# EAGLE board Mega Design (EAGLE 8.4.1)
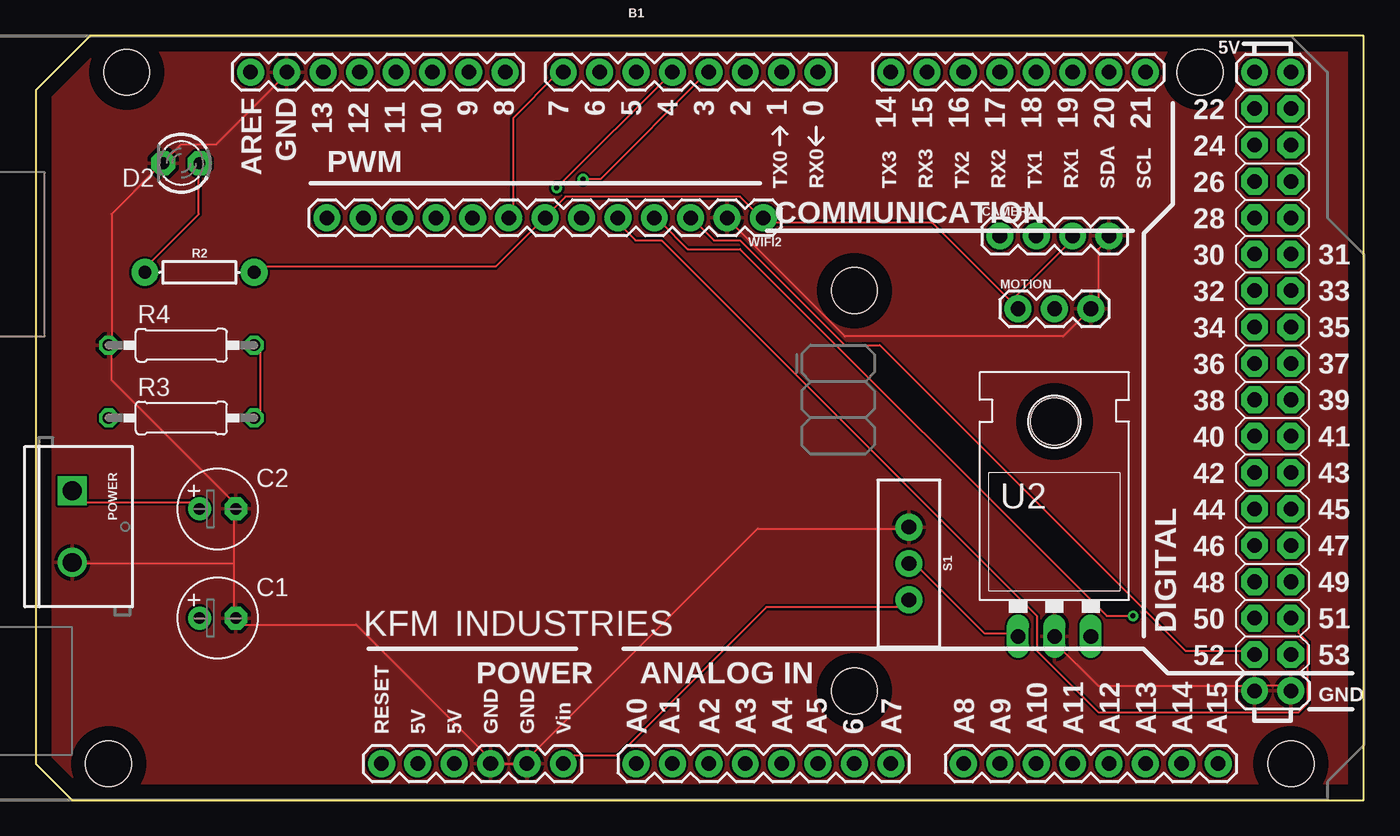
[diagram p0: board, top side]
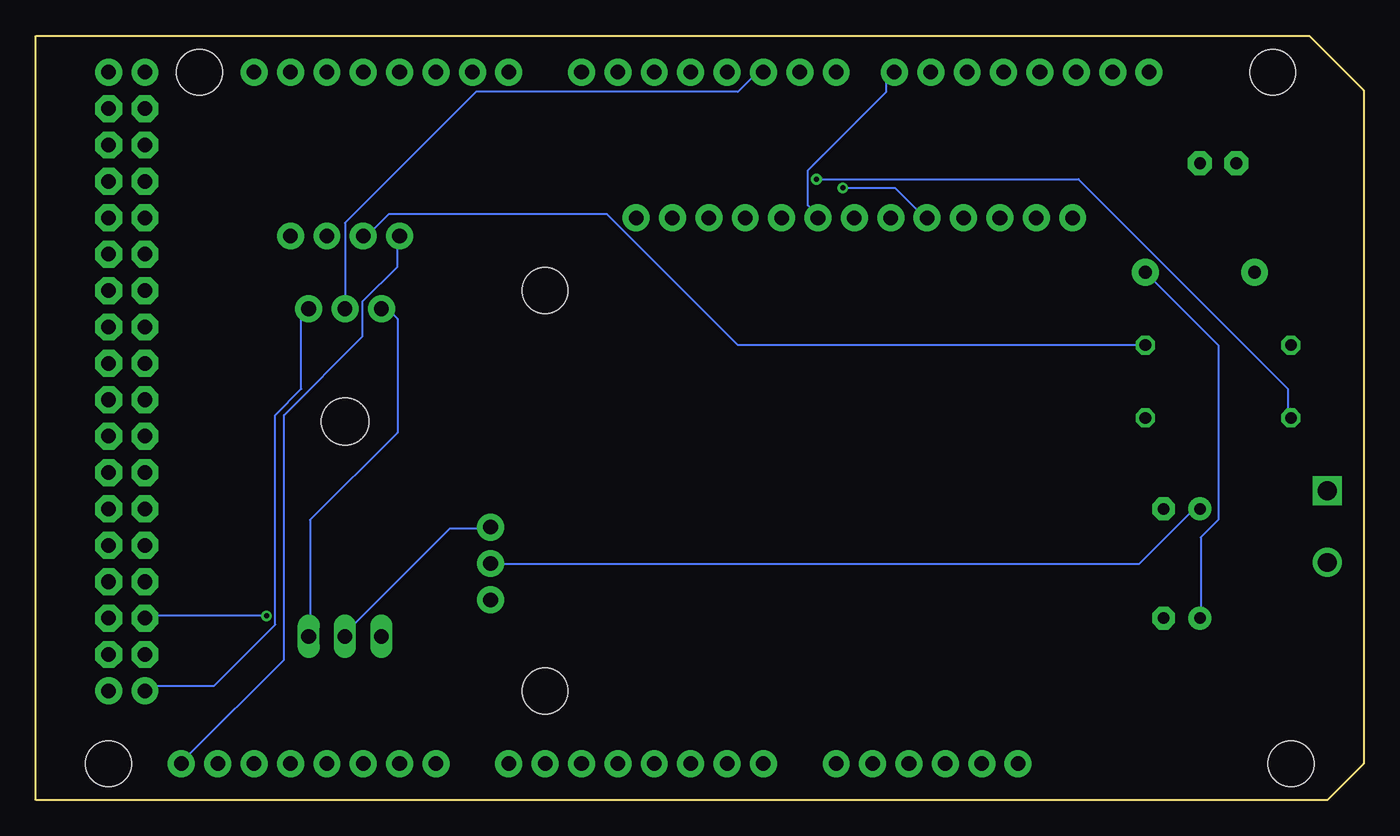
[diagram p1: board, bottom side, seen from below]

Size 92.71 x 53.34 mm. Coordinates in mm from the lower left corner, seen from the top.
Outline: 3.81,53.34 0,49.53 0,2.54 2.54,0 92.71,0 92.71,53.34 3.81,53.34
Copper layers (1*16): Top 0.035mm / dielectric 1.5mm / Bottom 0.035mm
Design rules "default": minimum track width 6mil, minimum drill 0.35mm, track to track 6mil, track to pad 6mil, pad to pad 6mil, via to via 6mil, smd to smd 6mil, copper to edge 40mil, drill to drill 6mil, minimum pad ring 10mil, minimum via ring 8mil, stop-mask expansion 4mil, vias tented up to drill 0mil, thermal gap 10mil
Net classes: 2 gnd: width 0.305 mm, drill 0.711 mm, clearance 0.203 mm

## Footprints (pad centres in the part's own frame; a part is rotated, then mirrored left to right if it is on the bottom)
ARDUINO_MEGA = drill 1.016 pad 1.88: 0 13.97,24.13; 1 11.43,24.13; 2 8.89,24.13; 3 6.35,24.13; 3.3V -13.97,-24.13; 4 3.81,24.13; 5 1.27,24.13; 5V@0 -11.43,-24.13; 5V@1 44.45,24.13; 5V@2 46.99,24.13; 6 -1.27,24.13; 7 -3.81,24.13; 8 -7.874,24.13; 9 -10.414,24.13; 10 -12.954,24.13; 11 -15.494,24.13; 12 -18.034,24.13; 13 -20.574,24.13; 14 19.05,24.13; 15 21.59,24.13; 16 24.13,24.13; 17 26.67,24.13; 18 29.21,24.13; 19 31.75,24.13; 20 34.29,24.13; 21 36.83,24.13; A0 1.27,-24.13; A1 3.81,-24.13; A2 6.35,-24.13; A3 8.89,-24.13; A4 11.43,-24.13; A5 13.97,-24.13; A6 16.51,-24.13; A7 19.05,-24.13; A8 24.13,-24.13; A9 26.67,-24.13; A10 29.21,-24.13; A11 31.75,-24.13; A12 34.29,-24.13; A13 36.83,-24.13; A14 39.37,-24.13; A15 41.91,-24.13; AREF -25.654,24.13; GND@0 -8.89,-24.13; GND@1 -6.35,-24.13; GND@2 44.45,-19.05; GND@3 46.99,-19.05; GND@4 -23.114,24.13; RESET -16.51,-24.13; VIN -3.81,-24.13 | drill 1.016 pad 1.88 octagon: 22 44.45,21.59; 23 46.99,21.59; 24 44.45,19.05; 25 46.99,19.05; 26 44.45,16.51; 27 46.99,16.51; 28 44.45,13.97; 29 46.99,13.97; 30 44.45,11.43; 31 46.99,11.43; 32 44.45,8.89; 33 46.99,8.89; 34 44.45,6.35; 35 46.99,6.35; 36 44.45,3.81; 37 46.99,3.81; 38 44.45,1.27; 39 46.99,1.27; 40 44.45,-1.27; 41 46.99,-1.27; 42 44.45,-3.81; 43 46.99,-3.81; 44 44.45,-6.35; 45 46.99,-6.35; 46 44.45,-8.89; 47 46.99,-8.89; 48 44.45,-11.43; 49 46.99,-11.43; 50 44.45,-13.97; 51 46.99,-13.97; 52 44.45,-16.51; 53 46.99,-16.51 | hole 3.2: -34.29,24.13; -35.56,-24.13; 16.51,8.89; 16.51,-19.05; 40.64,24.13; 46.99,-24.13
E2,5-6 = drill 0.813 pad 1.6: + -1.27,0 | drill 0.813 pad 1.6 octagon: - 1.27,0
1X04 = drill 1.016 pad 1.88: 1 0,0; 2 2.54,0; 3 5.08,0; 4 7.62,0
LED3MM = drill 0.813 pad 1.676 octagon: A -1.27,0; K 1.27,0
1X03 = drill 1.016 pad 1.88: 1 0,0; 2 2.54,0; 3 5.08,0
SCREWTERMINAL-5MM-2 = drill 1.3 pad 2.032 square: 1 0,0 | drill 1.3 pad 2.032: 2 5,0
AXIAL-0.3 = drill 0.9 pad 1.88: P$1 -3.81,0; P$2 3.81,0
0207/10 = drill 0.813 octagon: 1 -5.08,0; 2 5.08,0
SWITCH_SPDT_PTH_11.6X4.0MM = drill 1.016 pad 1.88: 1 0,2.54; 2 0,0; 3 0,-2.54
TO-220-ALT = drill 1.016 long: GND 0,-3.81; IN -2.54,-3.81; OUT 2.54,-3.81 | hole 3.302: 0,11.176
1X13 = drill 1.016 pad 1.88: 1 0,0; 2 2.54,0; 3 5.08,0; 4 7.62,0; 5 10.16,0; 6 12.7,0; 7 15.24,0; 8 17.78,0; 9 20.32,0; 10 22.86,0; 11 25.4,0; 12 27.94,0; 13 30.48,0

## Placement (x,y rotation side)
B1  ARDUINO_MEGA_R3FULL  [ARDUINO_MEGA]  40.64,26.67 0 top
C1  10uf  [E2,5-6]  12.7,12.7 0 top
C2  10uf  [E2,5-6]  12.7,20.32 0 top
CAMERA  [1X04]  67.31,39.37 0 top
D2  [LED3MM]  10.16,44.45 180 top
MOTION  [1X03]  68.58,34.29 0 top
POWER  [SCREWTERMINAL-5MM-2]  2.54,21.59 270 top
R2  1k  [AXIAL-0.3]  11.43,36.83 0 top
R3  10k  [0207/10]  10.16,26.67 0 top
R4  10k  [0207/10]  10.16,31.75 0 top
S1  [SWITCH_SPDT_PTH_11.6X4.0MM]  60.96,16.51 180 top
U2  [TO-220-ALT]  71.12,15.24 0 top
WIFI2  [1X13]  50.8,40.64 180 top

## Library data of the parts
B1 = SparkFun-Boards
C1 C2 R3 R4 = rcl
CAMERA = SparkFun-Connectors; PROD_ID: CONN-09696
D2 = minimidi
MOTION WIFI2 = SparkFun-Connectors
POWER = SparkFun-Connectors; SF_SKU: PRT-08432
R2 = SparkFun-Resistors; PROD_ID: RES-08380
S1 = SparkFun-Switches; PROD_ID: SWCH-08261; SF_SKU: COM-00102
U2 = SparkFun-IC-Power; PROD_ID: VREG-08450; SF_ID: COM-00107

## Nets
9V: B1.VIN S1.1
ANALOG15: B1.A15 CAMERA.1
CLOCK: B1.52 WIFI2.3
DIGITAL2: B1.2
DIGITAL3: B1.3 R3.1
DIGITAL4: B1.4 WIFI2.9
DIGITAL5: B1.5 MOTION.2
DIGITAL6: B1.6
DIGITAL7: B1.7 WIFI2.8
DIGITAL8: B1.8 WIFI2.6
DIGITAL9: B1.9
DIGITAL10: B1.10
DIGITAL11: B1.11
DIGITAL12: B1.12
DIGITAL13: B1.13
GND: B1.GND@0 B1.GND@1 B1.GND@2 B1.GND@3 B1.GND@4 C1.- C2.- CAMERA.4 D2.K MOTION.3 POWER.2 R4.1 S1.3 U2.GND WIFI2.2
MISO: B1.50 WIFI2.4
MOSI: B1.51 WIFI2.5
N$1: C2.+ POWER.1 S1.2 U2.IN
N$3: D2.A R2.P$1
N$4: CAMERA.2 R3.2 R4.2
RX: B1.0
TX: B1.1
VIN: C1.+ CAMERA.3 MOTION.1 R2.P$2 U2.OUT WIFI2.1 WIFI2.7

## Tracks (layer width: path | path; a pad name or v marks a point on that pad's centre or on a via)
9V
  Top 0.152: B1.VIN 36.98,3.1 40.64,3.1 51,13.46 60.76,13.46 S1.1
ANALOG15
  Bottom 0.152: CAMERA.1 67.46,39.06 67.46,37.24 69.9,34.8 69.9,32.36 75.39,26.87 75.39,9.8 82.09,3.1 B1.A15
CLOCK
  Top 0.152: B1.52 84.53,10.41 80.26,10.41 58.93,31.75 56.49,31.75 49.17,39.06 47.35,39.06 46.13,40.28 WIFI2.3
DIGITAL3  (via drill 0.35)
  Top 0.152: v38.2,43.33 39.42,43.33 46.74,50.65 B1.3
  Bottom 0.152: v38.2,43.33 19.91,43.33 5.28,28.7 5.28,26.87 R3.1
DIGITAL4  (via drill 0.35)
  Top 0.152: B1.4 v36.37,42.72
  Bottom 0.152: v36.37,42.72 32.72,42.72 30.89,40.89 WIFI2.9
DIGITAL5
  Bottom 0.152: MOTION.2 71.12,40.28 61.98,49.43 43.69,49.43 42.47,50.65 B1.5
DIGITAL7
  Top 0.152: WIFI2.8 33.33,40.89 33.33,47.6 36.37,50.65 B1.7
DIGITAL8
  Bottom 0.152: B1.8 33.33,50.65 33.33,49.43 38.81,43.94 38.81,41.5 38.2,40.89 WIFI2.6
GND
  Top 0.152: CAMERA.4 74.78,39.06 74.17,38.46 74.17,34.8 MOTION.3 71.73,32.36 56.49,32.36 48.57,40.28 WIFI2.2 | B1.GND@3 87.58,7.98 85.14,7.98 B1.GND@2 84.53,7.98 74.17,7.98 71.12,11.02 U2.GND | 5.28,31.75 5.28,40.89 8.33,43.94 D2.K 8.94,44.55 10.16,45.77 12.6,45.77 17.48,50.65 B1.GND@4 | 13.82,16.51 13.82,20.17 C2.- 13.82,20.78 5.28,29.31 5.28,31.75 | 13.82,16.51 13.82,12.85 C1.- 14.43,12.24 22.35,12.24 31.5,3.1 B1.GND@0 32.11,2.49 33.93,2.49 B1.GND@1 34.54,3.1 50.39,18.95 60.76,18.95 S1.3 | 13.82,16.51 2.84,16.51 POWER.2 | 5.28,31.75 R4.1
  Bottom 0.152: U2.GND 71.12,11.63 63.81,18.95 61.37,18.95 S1.3 | MOTION.3 74.17,34.19 74.17,28.7 76,26.87 76,12.24 80.26,7.98 84.53,7.98 B1.GND@2
  pour Top: 3.81,53.34 0,49.53 0,2.54 2.54,0 92.71,0 92.71,53.34
MISO  (via drill 0.35)
  Top 0.152: v76.61,12.85 74.78,12.85 49.17,38.46 45.52,38.46 43.69,40.28 WIFI2.4
  Bottom 0.152: v76.61,12.85 84.53,12.85 B1.50
MOSI
  Top 0.152: B1.51 88.19,12.24 88.19,11.63 88.8,11.02 88.8,6.76 88.19,6.15 74.17,6.15 69.9,10.41 69.9,12.85 43.69,39.06 41.86,39.06 40.64,40.28 WIFI2.5
N$1
  Top 0.152: C2.+ 11.38,20.78 3.45,20.78 2.84,21.39 POWER.1 | U2.IN 68.07,11.63 66.24,11.63 61.37,16.51 S1.2
  Bottom 0.152: S1.2 15.65,16.51 11.99,20.17 C2.+
N$3
  Top 0.152: D2.A 11.38,43.94 11.38,40.89 7.72,37.24 R2.P$1
N$4
  Top 0.152: R3.2 15.65,26.87 15.65,31.75 R4.2
  Bottom 0.152: R4.2 43.69,31.75 52.83,40.89 68.07,40.89 69.29,39.68 CAMERA.2
VIN
  Top 0.152: 68.07,34.8 72.34,39.06 CAMERA.3 | 68.07,34.8 62.59,40.28 51,40.28 WIFI2.1 50.39,40.89 49.17,42.11 36.98,42.11 35.76,40.89 WIFI2.7 35.15,40.28 32.11,37.24 15.65,37.24 R2.P$2 | 68.07,34.8 MOTION.1
  Bottom 0.152: R2.P$2 10.16,31.75 10.16,19.56 11.38,18.34 11.38,12.85 C1.+ | U2.OUT 73.56,11.63 73.56,19.56 67.46,25.65 67.46,33.58 68.07,34.19 MOTION.1

## Text on the board
tPlace: KFM | INDUSTRIES